# Altium PCB PCB_rockets_test_bench_acquisition.PcbDoc (part 1 of 2)
Units mm, origin at the board's own origin, x right, y up, seen from the top; angles counter-clockwise.
Board outline 99.82 x 99.85 mm, 4 copper layers (Top Layer, Int1 (GND), Int2 (PWR), Bottom Layer), stack 1.57 mm thick; 106 components, 96 nets, 381 pads, 73 vias.
Unrouted connection lines stored in the file: 46.
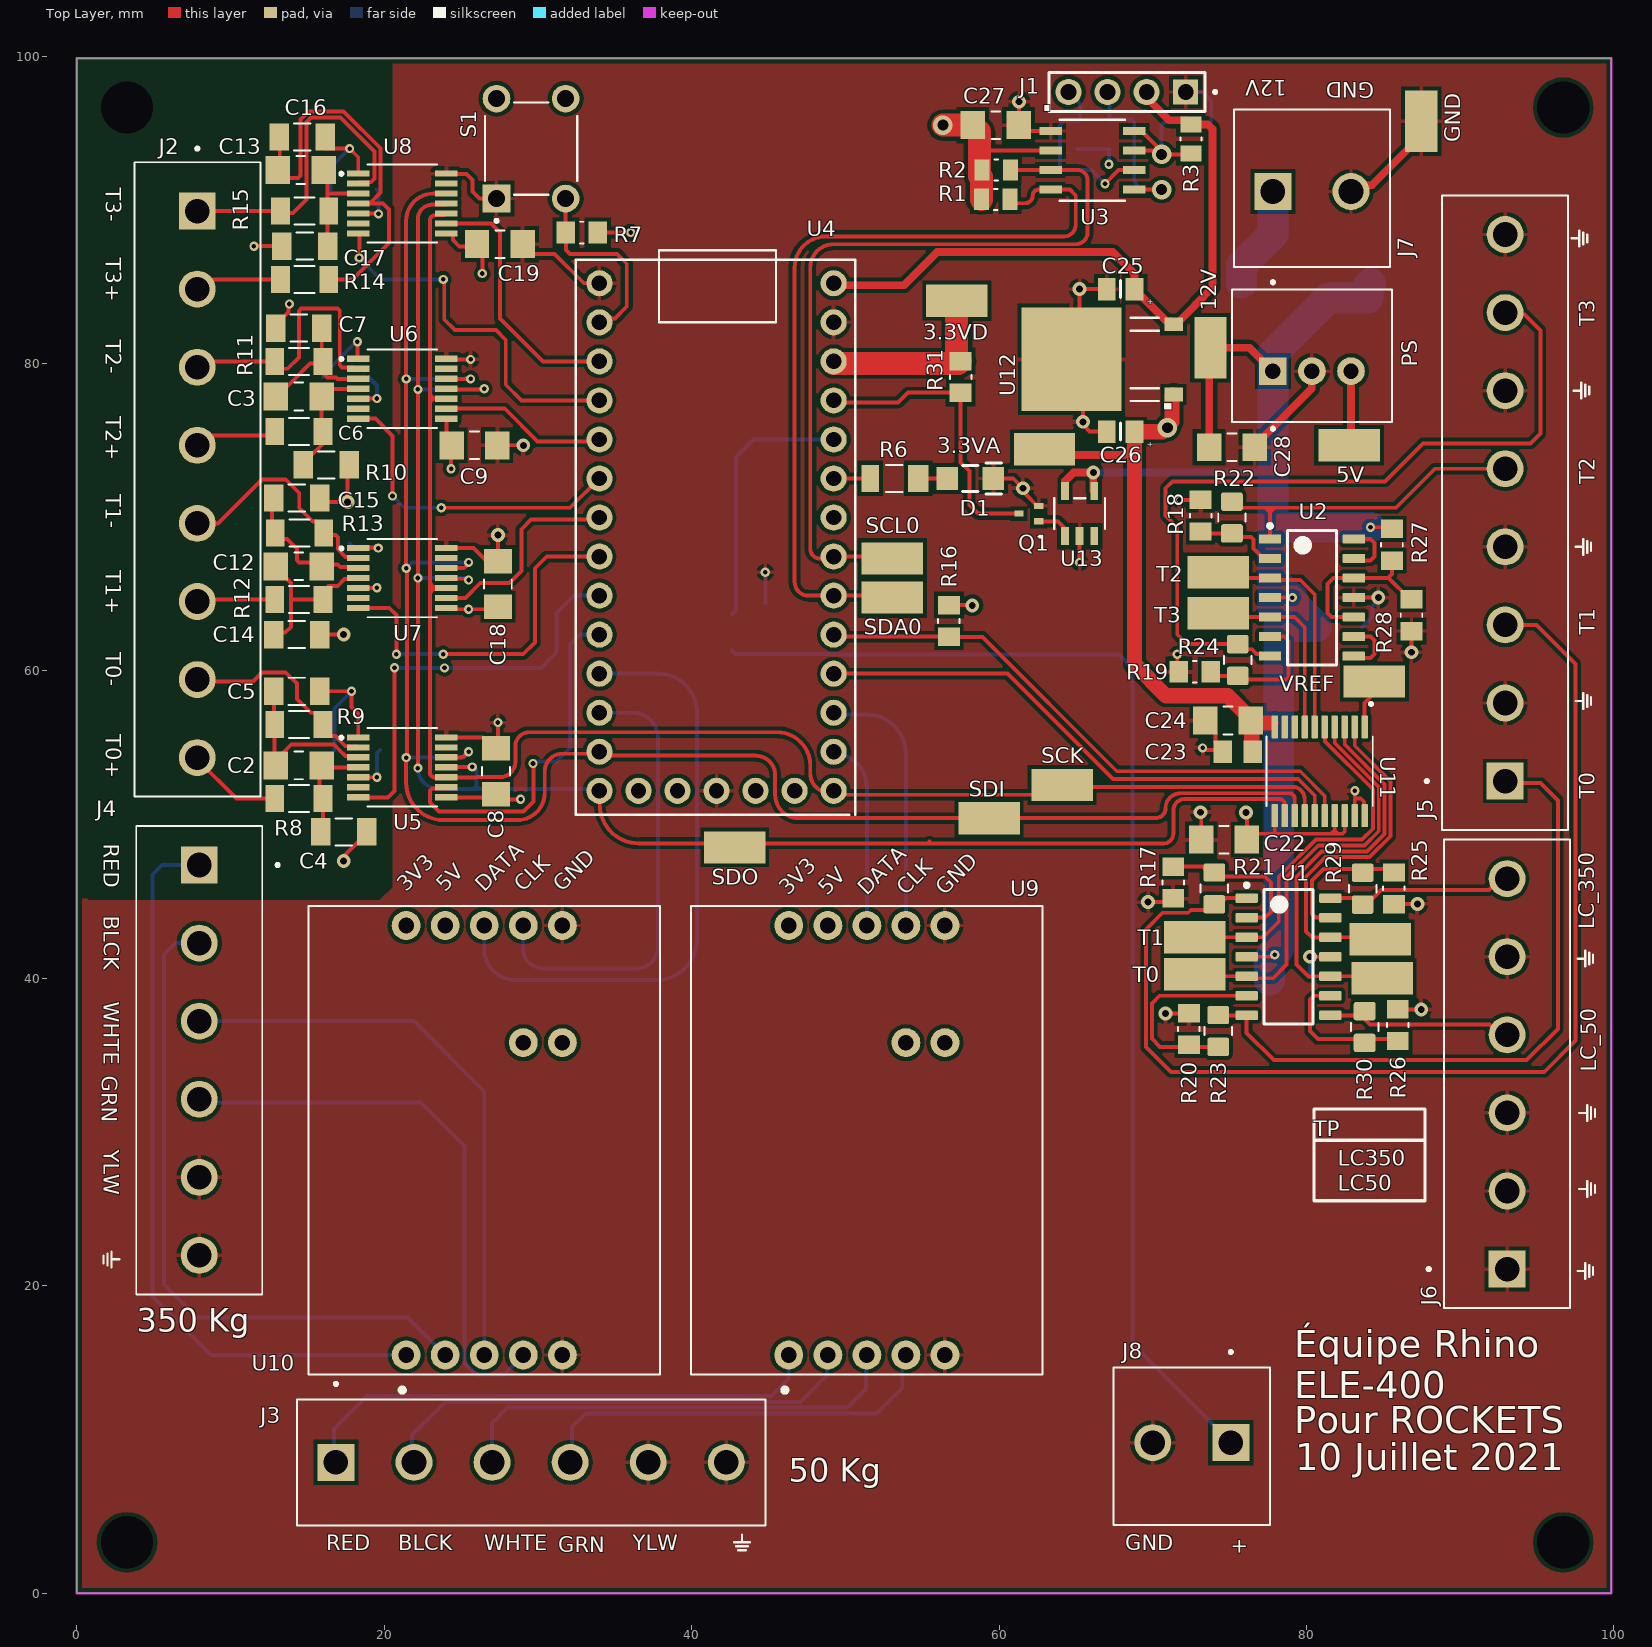
[diagram p0: Top Layer view]
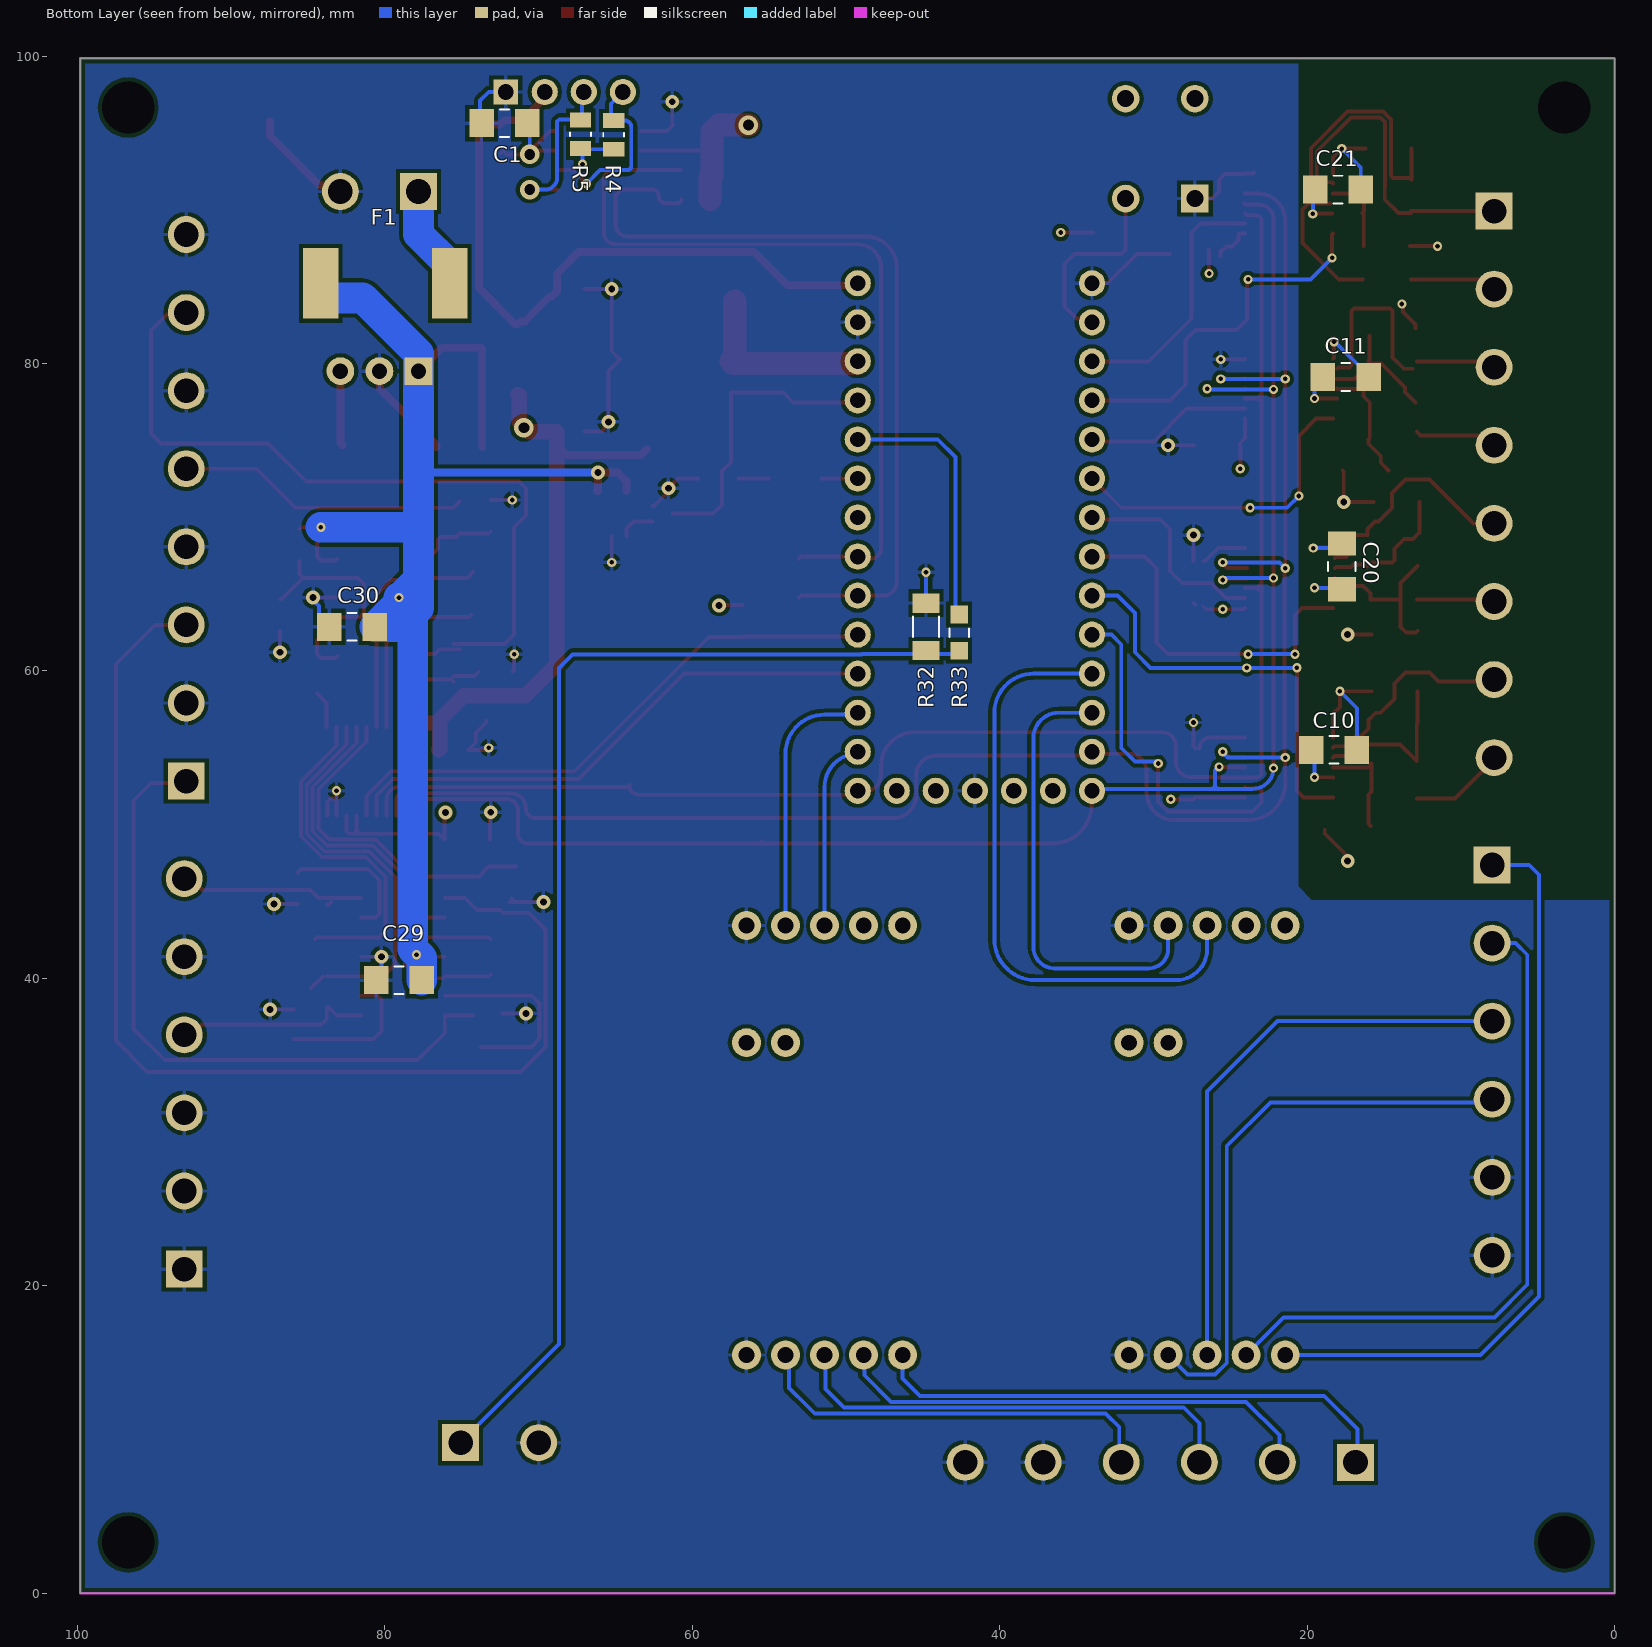
[diagram p1: Bottom Layer view, seen from below]
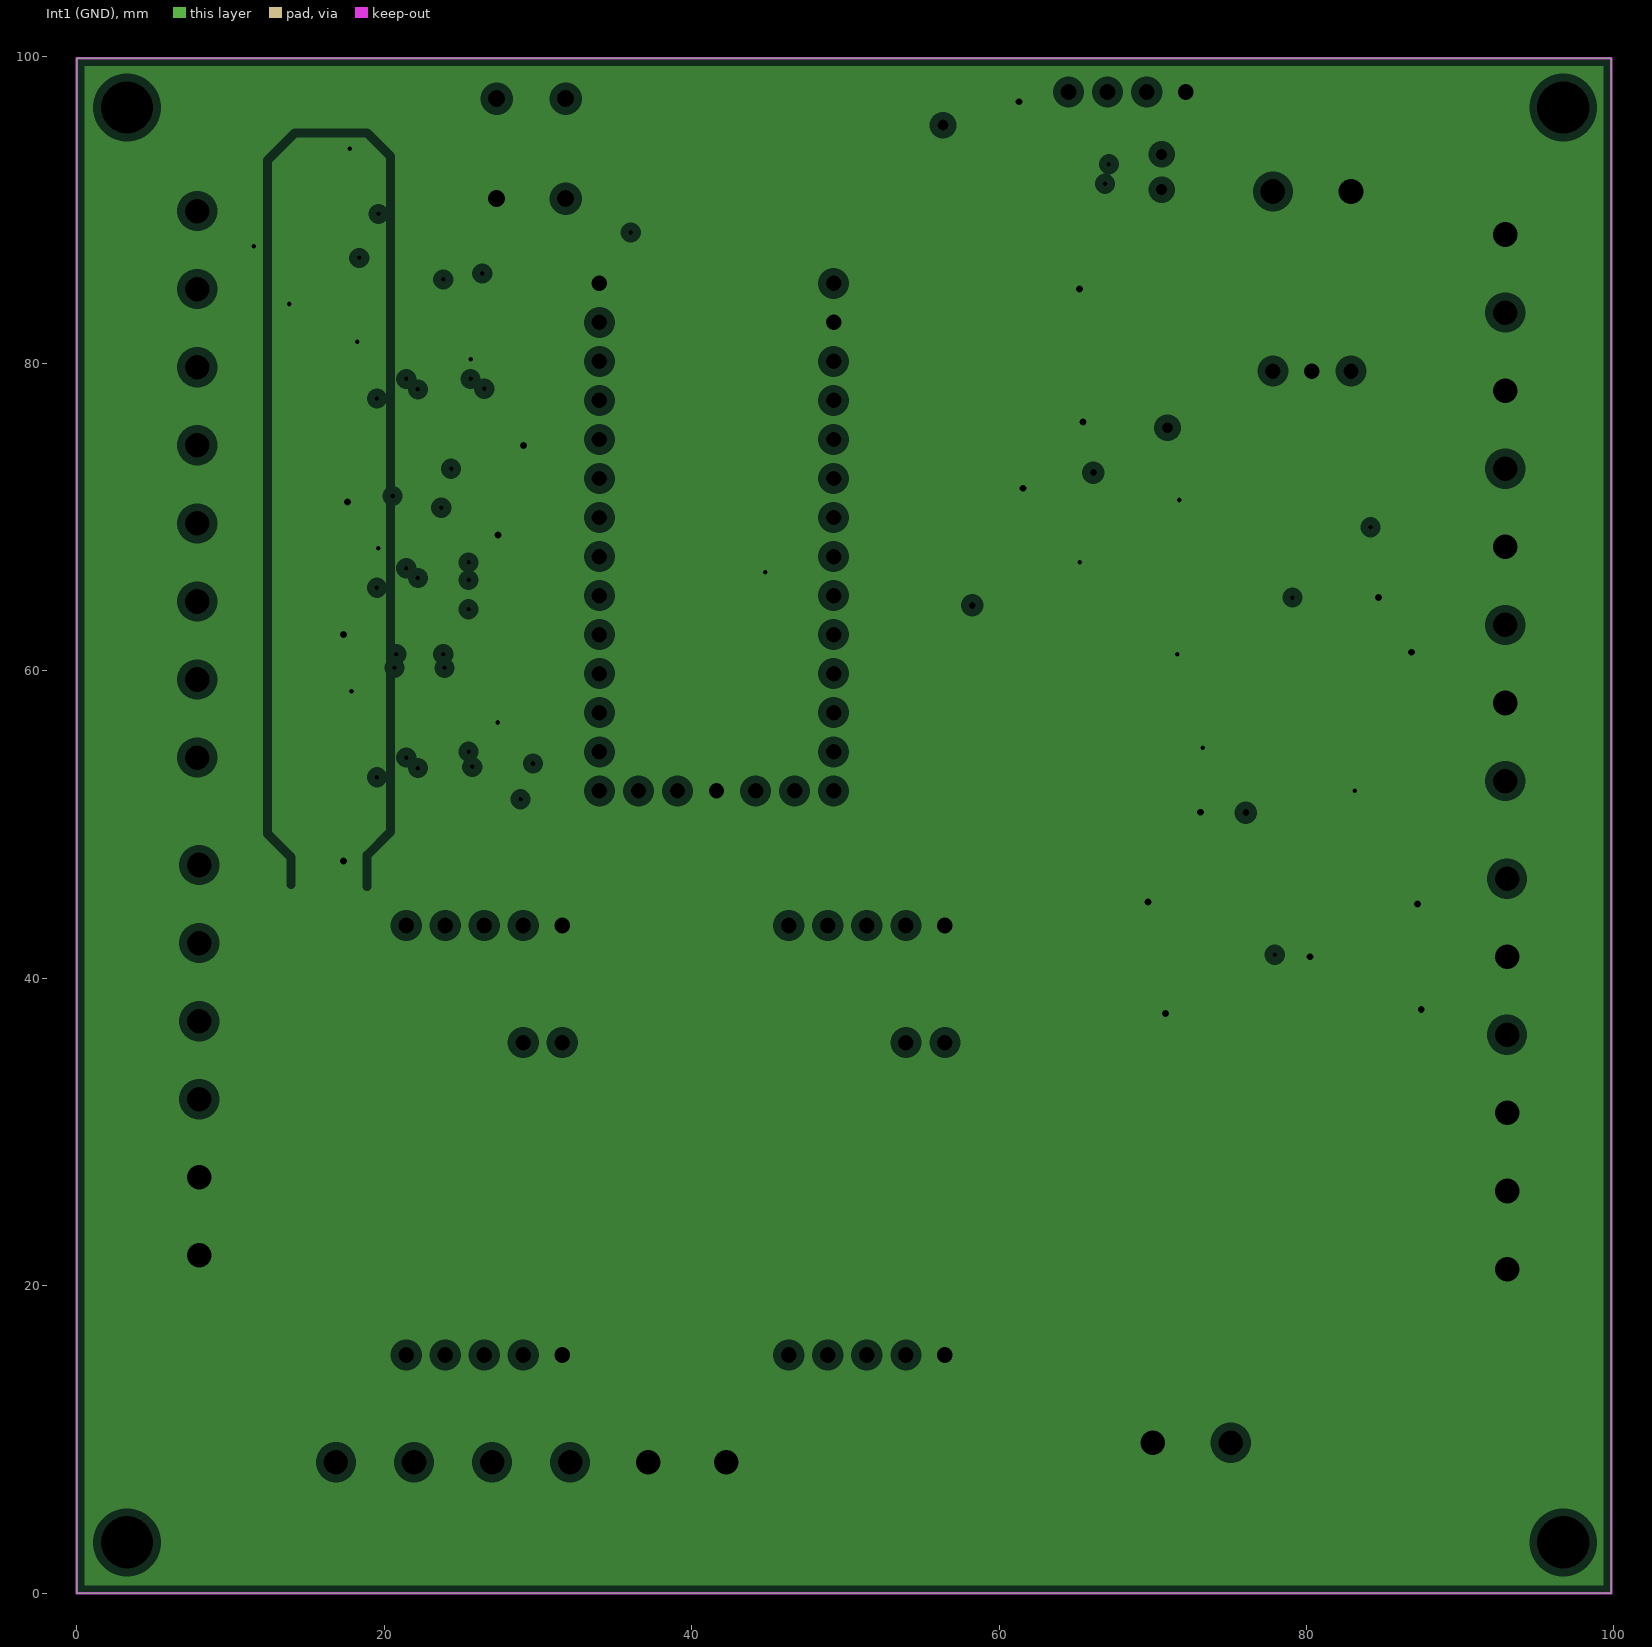
[diagram p2: Int1 (GND), clearances drawn from the general rule]
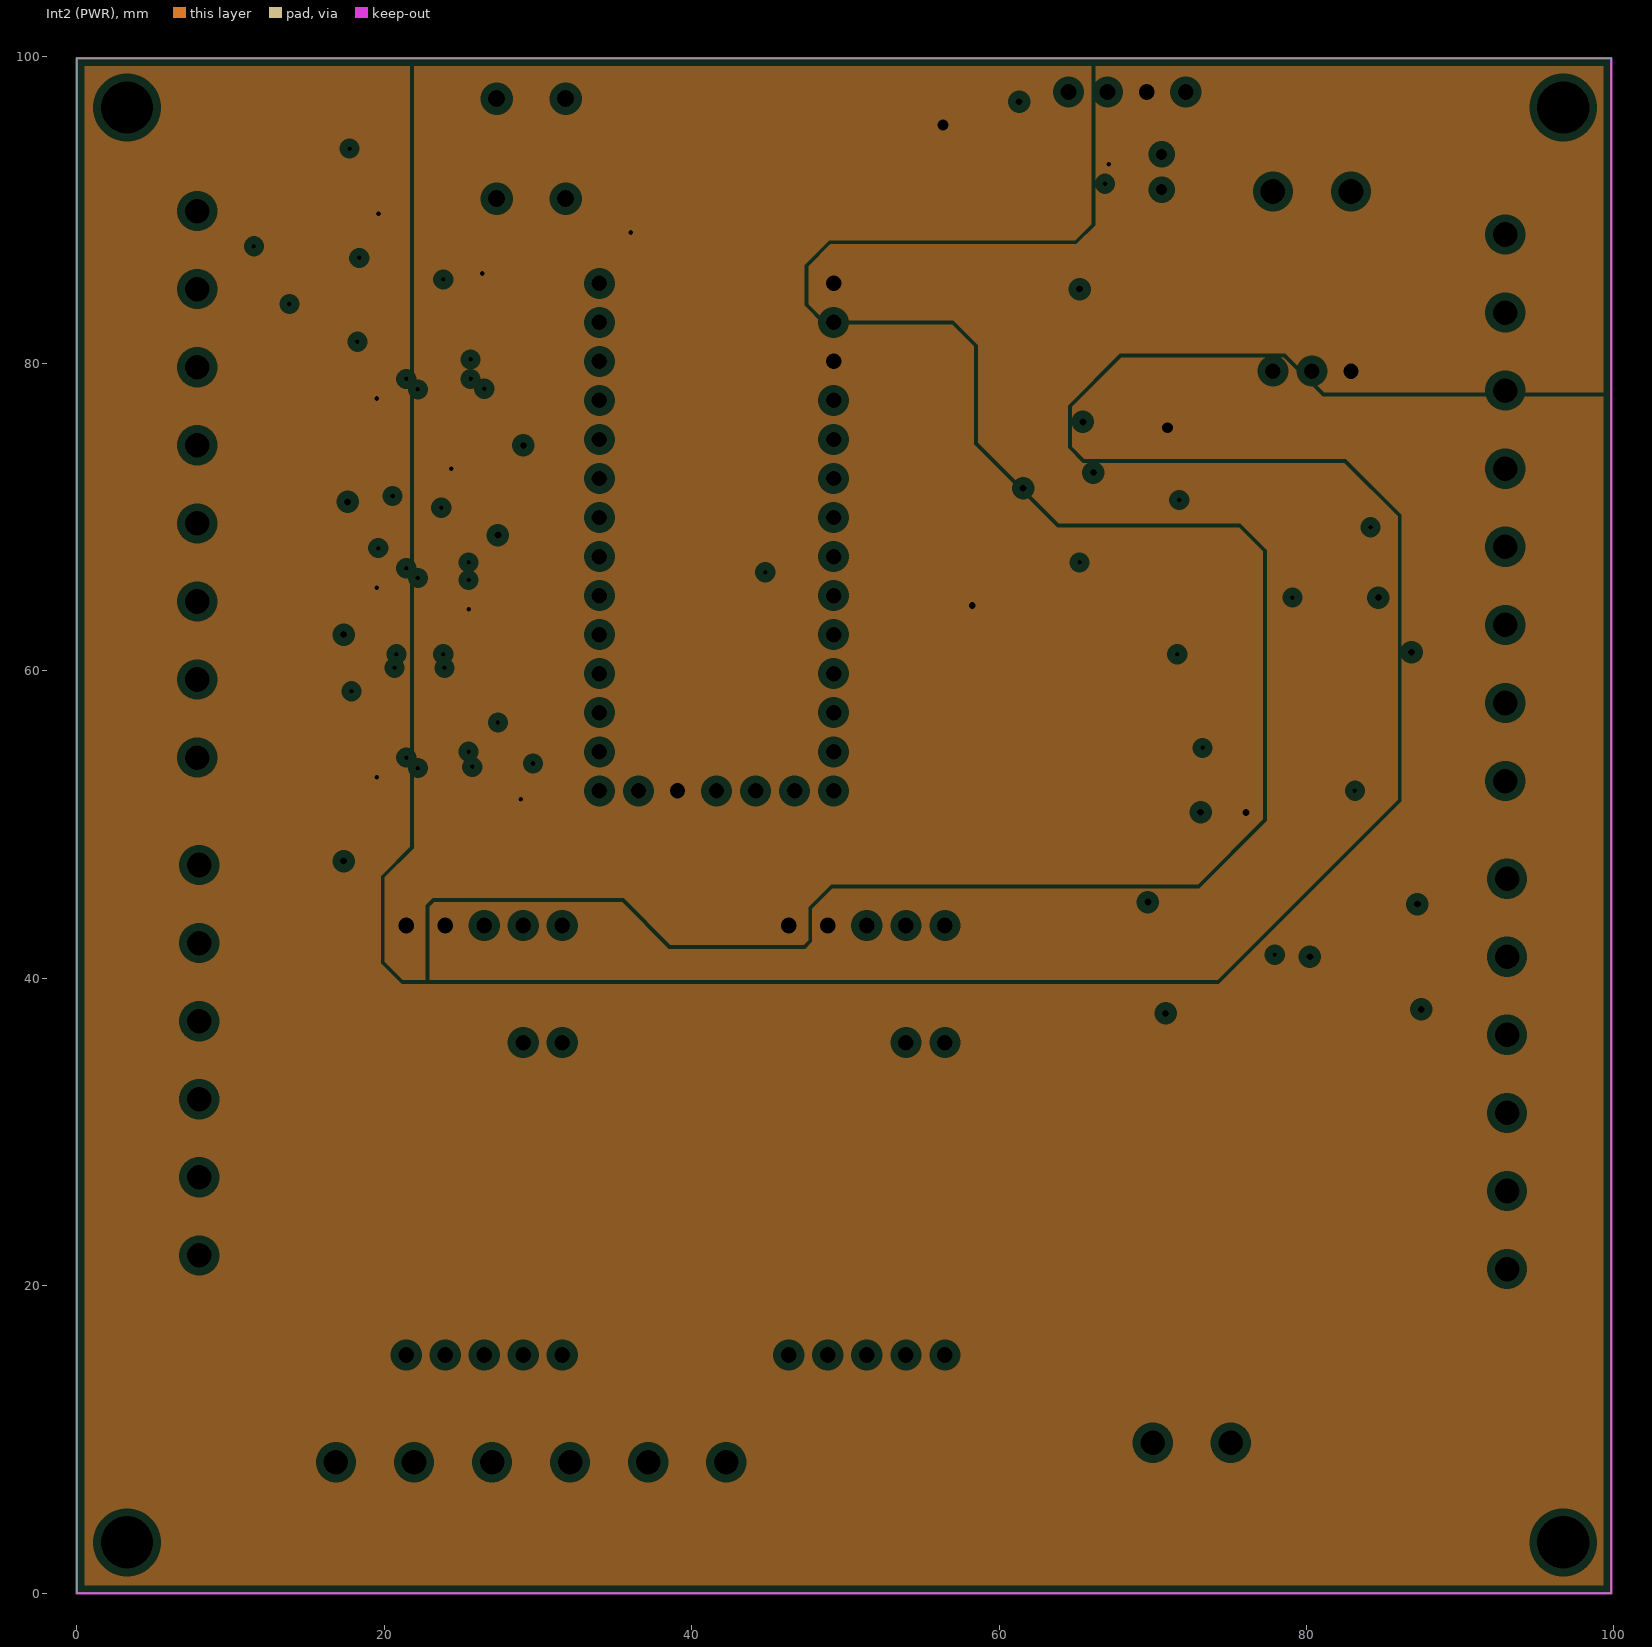
[diagram p3: Int2 (PWR), clearances drawn from the general rule]
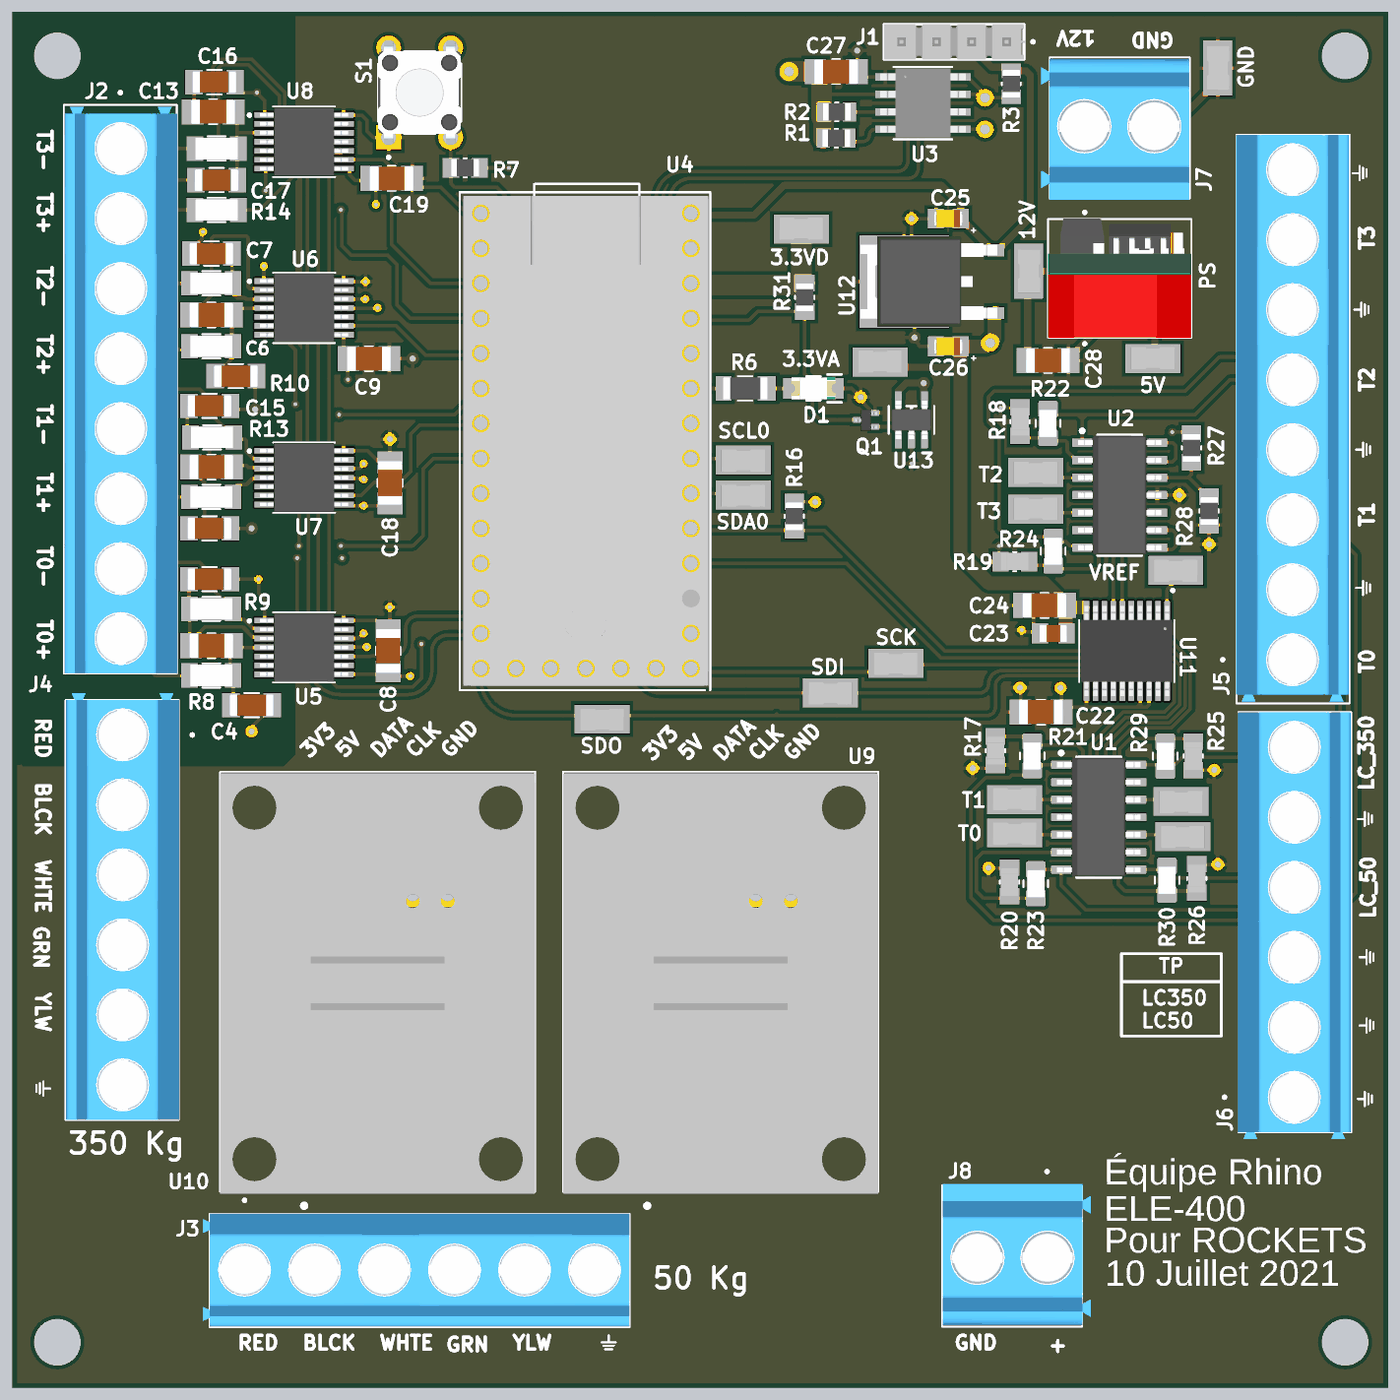
[diagram p5: 3D render of the assembled board from above, using the file's embedded part models]
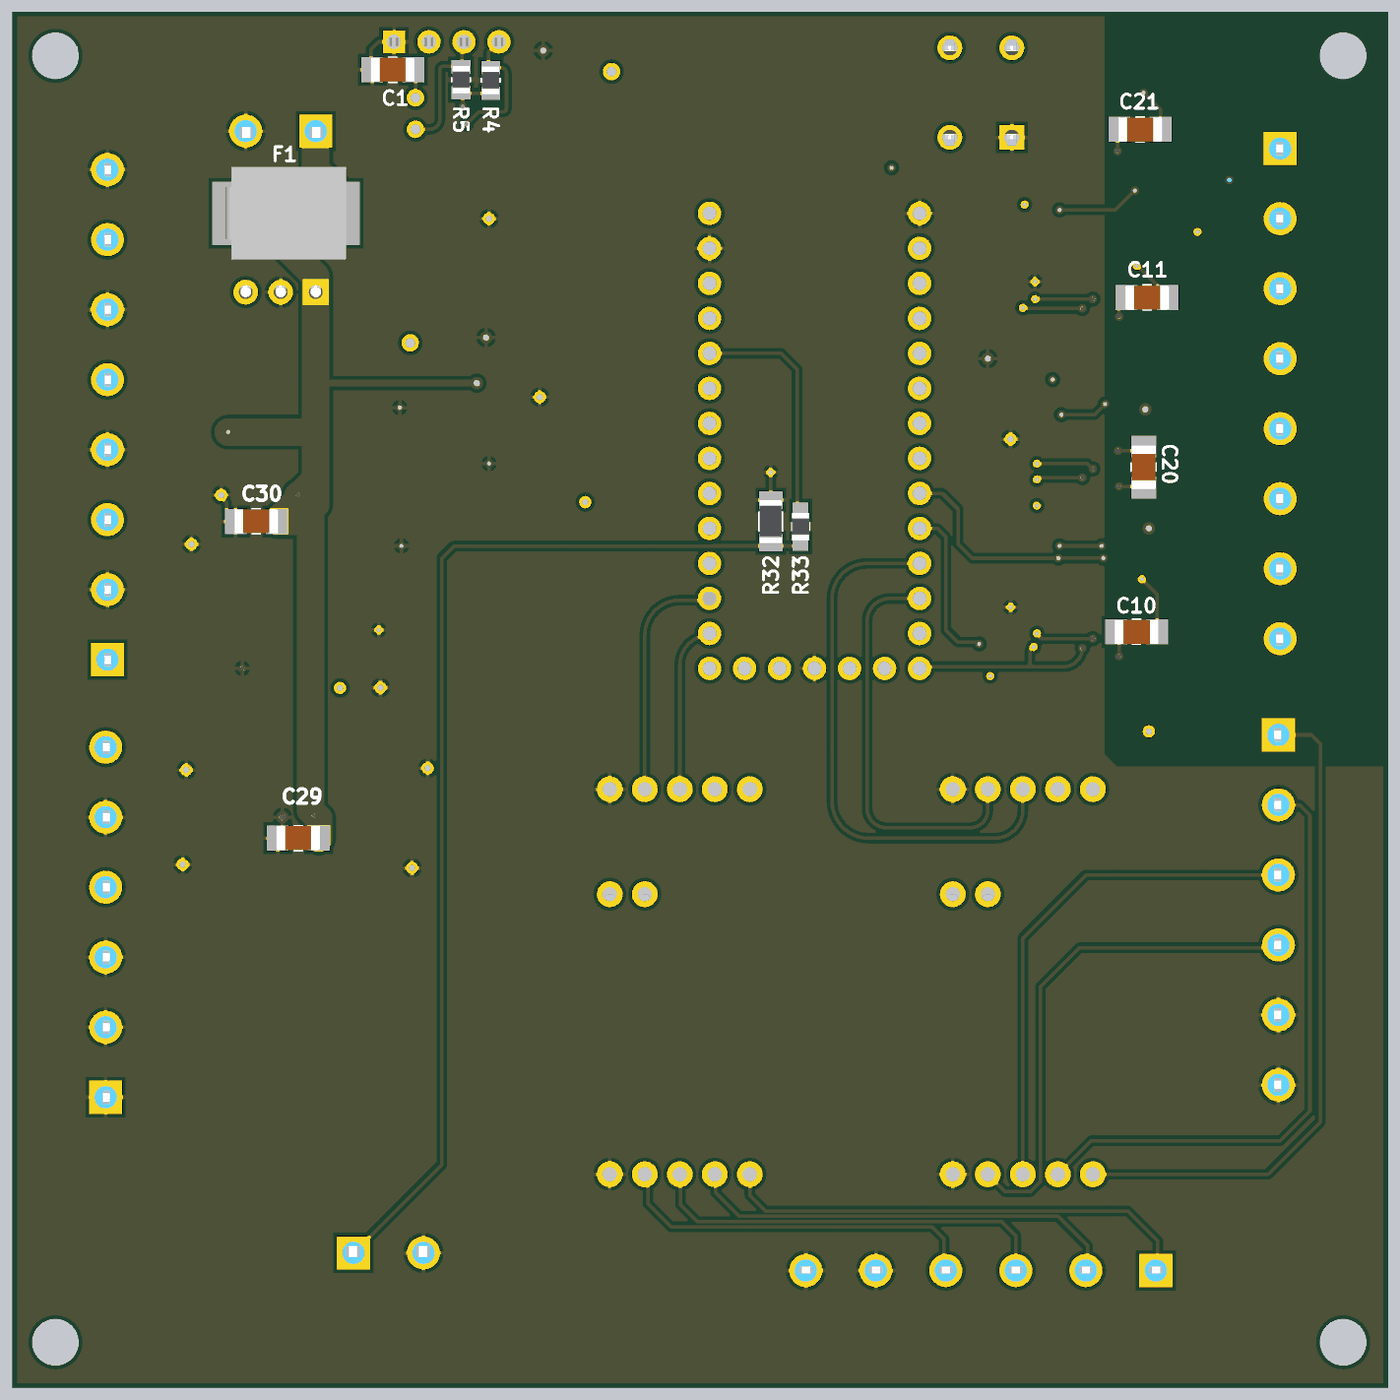
[diagram p6: 3D render of the assembled board from below, using the file's embedded part models]

## Layer stack, top to bottom
Top Solder: solder mask 0.015, SM-001, Dk 3.8
Top Layer: signal copper 0.035
Dielectric 1: prepreg 0.2, PP-017, Dk 4.6
Int1 (GND): plane copper 0.0175, net GND
Dielectric 3: core 1.065, Core-039, Dk 4.5
Int2 (PWR): plane copper 0.0175, net (Multiple Nets)
Dielectric 5: prepreg 0.2, PP-017, Dk 4.6
Bottom Layer: signal copper 0.035
Bottom Solder: solder mask 0.015, SM-001, Dk 3.8

## Board outline
0,0 0,99.848 99.822,99.848 99.822,0

## Design rules (kind name [scope] priority, off if disabled: settings)
BoardOutlineClearance [All] p1: gap=0.254 ignorepadtopadclearanceinfootprint=FALSE except(0: Arc-SplitContinuation Track-SplitContinuation SMDPad-SplitContinuation THPad-SplitContinuation Via-SplitContinuation Fill-SplitContinuation Poly-SplitContinuation Region-SplitContinuation Text-SplitContinuation)
Clearance [All] p1: gap=0.254 ignorepadtopadclearanceinfootprint=FALSE except(0: Arc-Hole Track-Hole SMDPad-Hole THPad-Hole Via-Hole Fill-Hole Poly-Hole Region-Hole Text-Hole; 0.127: Arc-Arc Arc-Track Track-Track SMDPad-SMDPad; 0.2: Arc-SMDPad Arc-THPad Track-SMDPad Track-THPad; 0.5: THPad-THPad)
HoleSize [All] p1: absolutevalues=TRUE maxlimit=6.3 minlimit=0.2 maxpercent=80.000 minpercent=20.000
HoleSize ViaSize [IsVia] p2: absolutevalues=TRUE maxlimit=6.3 minlimit=0.3 maxpercent=80.000 minpercent=20.000
HoleToHoleClearance [All] p1: gap=0.5 allowstackedmicrovias=TRUE
MinimumAnnularRing MinimumAnnularRing_1 [IsVia] p1: minimumring=0.15
MinimumAnnularRing [All] p2: minimumring=0.3
MinimumSolderMaskSliver [All] p1: minsoldermaskwidth=0.2
PlaneClearance [All] p1: clearance=0.508
PlaneConnect [All] p1: planeconnectstyle=Relief reliefexpansion=0.508 reliefentries=4 reliefconductorwidth=0.254 reliefairgap=0.254
PolygonConnect [All] p1: connectstyle=Relief reliefconductorwidth=0.254 reliefentries=4 polygonreliefangle="90 Angle" airgapwidth=0.254
RoutingVias [All] p1: holewidth=0.5 width=0.9 viastyle="Through Hole" minholewidth=0.3 minwidth=0.4 maxholewidth=0.711 maxwidth=1.27
SilkToSolderMaskClearance [IsPad] p1: minsilkscreentomaskgap=0.15 clearancetoexposedcopper=TRUE
SolderMaskExpansion [All] p1: expansion=0.05 istentingtop=FALSE
UnRoutedNet [All] p1: checkbadconnections=TRUE
Width [All] p1: maxlimit=5 minlimit=0.127 preferedwidth=0.254
23 further rules are at their usual default settings.

## Classes and differential pairs
component class Thermocouples: C2 C3 C4 C5 C6 C7 C8 C9 C10 C11 C12 C13 C14 C15 C16 C17 C18 C19 C20 C21 J2 R8 R9 R10 R11 R12 R13 R14 R15 U5 U6 U7 U8
component class Teensy: C1 C27 D1 J1 J8 R1 R2 R3 R4 R5 R6 R7 R32 R33 S1 SCK SCL0 SDA0 SDI SDO U3 U4
component class Loadcells: J3 J4 U9 U10
component class DAC: C22 C23 C24 C29 C30 J5 J6 LC50 LC350 R16 R17 R18 R19 R20 R21 R22 R23 R24 R25 R26 R27 R28 R29 R30 T0 T1 T3 TP_T1 U1 U2 U11 VREF
component class Alim: 3.3vA 3.3VA 3.3VD 5V 12V C25 C26 C28 F1 GND J7 PS Q1 R31 U12 U13

## Components (designator, comment, footprint, x,y, rotation, side; value= is the part's Value field where it differs from the comment)
3.3VA "RCS-0C" RCS-0C 62.952,74.422 r180 top
3.3VD "RCS-0C" RCS-0C 57.237,84.074 r180 top
5V "RCS-0C" RCS-0C 82.764,74.676 r180 top
12V "RCS-0C" RCS-0C 73.747,81.026 r90 top
C1 "C3216C0G1H104J160AA" C3216C0G1H104J160AA 72.223,95.631 r180 bottom value=0.1uF
C2 "C3216C0G1H104J160AA" C3216C0G1H104J160AA 14.438,53.848 r180 top value=0.1uF
C3 "C3216C0G1H104J160AA" C3216C0G1H104J160AA 14.438,77.851 r180 top value=0.1uF
C4 "GRM3195C1H113JA01D" GRM3195C1H113JA01D 17.359,49.53 r180 top value="0.011 uF"
C5 "GRM3195C1H113JA01D" GRM3195C1H113JA01D 14.311,58.674 r0 top value="0.011 uF"
C6 "GRM3195C1H113JA01D" GRM3195C1H113JA01D 16.216,73.406 r180 top value="0.011 uF"
C7 "GRM3195C1H113JA01D" GRM3195C1H113JA01D 14.438,82.296 r180 top value="0.011 uF"
C8 "C3216C0G1H104J160AA" C3216C0G1H104J160AA 27.265,53.467 r270 top value=0.1uF
C9 "C3216C0G1H104J160AA" C3216C0G1H104J160AA 25.868,74.676 r180 top value=0.1uF
C10 "C3216C0G1H104J160AA" C3216C0G1H104J160AA 18.248,54.864 r0 bottom value=0.1uF
C11 "C3216C0G1H104J160AA" C3216C0G1H104J160AA 17.486,79.121 r0 bottom value=0.1uF
C12 "C3216C0G1H104J160AA" C3216C0G1H104J160AA 14.438,66.802 r0 top value=0.1uF
C13 "C3216C0G1H104J160AA" C3216C0G1H104J160AA 14.565,92.583 r0 top value=0.1uF
C14 "GRM3195C1H113JA01D" GRM3195C1H113JA01D 14.311,62.357 r180 top value="0.011 uF"
C15 "GRM3195C1H113JA01D" GRM3195C1H113JA01D 14.311,71.247 r0 top value="0.011 uF"
C16 "GRM3195C1H113JA01D" GRM3195C1H113JA01D 14.663,94.742 r180 top value="0.011 uF"
C17 "GRM3195C1H113JA01D" GRM3195C1H113JA01D 14.819,87.63 r180 top value="0.011 uF"
C18 "C3216C0G1H104J160AA" C3216C0G1H104J160AA 27.392,65.659 r270 top value=0.1uF
C19 "C3216C0G1H104J160AA" C3216C0G1H104J160AA 27.519,87.757 r180 top value=0.1uF
C20 "C3216C0G1H104J160AA" C3216C0G1H104J160AA 17.74,66.802 r270 bottom value=0.1uF
C21 "C3216C0G1H104J160AA" C3216C0G1H104J160AA 17.994,91.313 r0 bottom value=0.1uF
C22 "C3216C0G1H104J160AA" C3216C0G1H104J160AA 74.636,49.022 r0 top value=0.1uF
C23 "EMK212BB7475MD-T" EMK212BB7475MD-T 75.525,54.737 r0 top value=4.7uF
C24 "C3216C0G1H104J160AA" C3216C0G1H104J160AA 74.89,56.769 r0 top value=0.1uF
C25 "TAJP106K010RNJ" CAPC2012X140N 67.905,84.836 r180 top value=10uF
C26 "TAJP106K010RNJ" CAPC2012X140N 67.905,75.565 r180 top value=10uF
C27 "C3216C0G1H104J160AA" C3216C0G1H104J160AA 59.777,95.504 r180 top value=0.1uF
C28 "C3216C0G1H104J160AA" C3216C0G1H104J160AA 75.144,74.549 r180 top value=0.1uF
C29 "C3216C0G1H104J160AA" C3216C0G1H104J160AA 79.081,39.878 r180 bottom value=0.1uF
C30 "C3216C0G1H104J160AA" C3216C0G1H104J160AA 82.129,62.865 r180 bottom value=0.1uF
D1 "150120YS75000" 150120YS75000 58.126,72.517 r180 top
F1 "MF-SM150/33-2" MF-SM150/33-2 79.97,85.217 r180 bottom
GND "RCS-0C" RCS-0C 87.463,95.758 r90 top
J1 "TSW-104-14-T-S" TSW-104-14-T-S 72.136,97.663 r180 top
J2 "TB006-508-08BE" TB006-508-08BE_v2 7.834,89.916 r270 top
J3 "TB006-508-06BE" TB006-508-06BE 16.851,8.509 r0 top
J4 "TB006-508-06BE" TB006-508-06BE 7.961,47.371 r270 top
J5 "TB006-508-08BE" TB006-508-08BE 92.924,52.832 r90 top
J6 "TB006-508-06BE" TB006-508-06BE 93.051,21.082 r90 top
J7 "TB007-508-02BE" CUI_TB007-508-02BE 77.811,91.186 r0 top
J8 "TB007-508-02BE" CUI_TB007-508-02BE 75.074,9.787 r180 top
LC50 "RCS-0C" RCS-0C 84.923,40.005 r0 top
LC350 "RCS-0C" RCS-0C 84.796,42.545 r0 top
PS "OKI-78SR-5/1.5-W36-C" CONV_OKI-78SR-5/1.5-W36-C 80.351,79.502 r0 top
Q1 "DMN5L06TK" DMN5L06TK 61.936,70.231 r90 top
R1 "ESR10EZPJ222" RESC2012X65N 59.777,90.678 r180 top
R2 "ESR10EZPJ222" RESC2012X65N 59.818,92.583 r180 top
R3 "ERJ-6GEYJ204V" RESC2012X70N 72.477,94.615 r90 top
R4 "ESR10EZPJ222" RESC2012X65N 65.111,94.869 r270 bottom
R5 "ESR10EZPJ222" RESC2012X65N 67.27,94.91 r270 bottom
R6 "RMCF1206JT470R" RMCF1206JT470R 53.173,72.517 r180 top value=470
R7 "CRGH0805F4K7" CRGH0805F4K7 32.853,88.519 r0 top value=4.7k
R8 "RNCS1206BKE100R" RNCS1206BKE100R 14.438,51.689 r0 top value=100
R9 "RNCS1206BKE100R" RNCS1206BKE100R 14.438,56.515 r180 top value=100
R10 "RNCS1206BKE100R" RNCS1206BKE100R 14.438,75.565 r0 top value=100
R11 "RNCS1206BKE100R" RNCS1206BKE100R 14.438,80.137 r0 top value=100
R12 "RNCS1206BKE100R" RNCS1206BKE100R 14.438,64.643 r0 top value=100
R13 "RNCS1206BKE100R" RNCS1206BKE100R 14.489,68.961 r180 top value=100
R14 "RNCS1206BKE100R" RNCS1206BKE100R 14.819,85.471 r0 top value=100
R15 "RNCS1206BKE100R" RNCS1206BKE100R 14.819,89.916 r0 top value=100
R16 "CRGH0805F4K7" CRGH0805F4K7 56.729,63.246 r90 top value=4.7k
R17 "CR0805-FX-1001ELF" CR0805-FX-1001ELF 71.334,46.228 r90 top value=1k
R18 "CR0805-FX-1001ELF" CR0805-FX-1001ELF 73.112,70.104 r270 top value=1k
R19 "CR0805-FX-1001ELF" CR0805-FX-1001ELF 72.731,59.944 r0 top value=1k
R20 "CR0805-FX-1001ELF" CR0805-FX-1001ELF 72.35,36.703 r270 top value=1k
R21 "CRG0805F3K0" CRG0805F3K0 74.001,45.847 r270 top value=3K
R22 "CRG0805F3K0" CRG0805F3K0 75.144,69.977 r90 top value=3K
R23 "CRG0805F3K0" CRG0805F3K0 74.255,36.576 r90 top value=3K
R24 "CRG0805F3K0" CRG0805F3K0 75.525,60.706 r90 top value=3K
R25 "CR0805-FX-1001ELF" CR0805-FX-1001ELF 85.685,45.847 r90 top value=1k
R26 "CR0805-FX-1001ELF" CR0805-FX-1001ELF 85.939,36.957 r270 top value=1k
R27 "CRGH0805F4K7" CRGH0805F4K7 85.558,68.199 r90 top value=4.7k
R28 "CRGH0805F4K7" CRGH0805F4K7 86.828,63.627 r90 top value=4.7k
R29 "CRG0805F3K0" CRG0805F3K0 83.653,45.828 r270 top value=3K
R30 "CRG0805F3K0" CRG0805F3K0 83.78,36.83 r90 top value=3K
R31 "CRGH0805F4K7" CRGH0805F4K7 57.491,79.121 r90 top value=4.7k
R32 "RC1206FR-07165RL" RC1206FR-07165RL 44.791,62.865 r270 bottom value=165
R33 "ERJ-P06J103V" ERJ-P06J103V 42.632,62.484 r90 bottom value=10k
S1 "B3F-1022" B3F-1022 29.551,93.98 r90 top
SCK "RCS-0C" RCS-0C 64.095,52.578 r0 top
SCL0 "RCS-0C" RCS-0C 53.046,67.31 r0 top
SDA0 "RCS-0C" RCS-0C 53.046,64.77 r0 top
SDI "RCS-0C" RCS-0C 59.35,50.419 r0 top
SDO "RCS-0C" RCS-0C 42.799,48.514 r0 top
T0 "RCS-0C" RCS-0C 72.731,40.259 r0 top
T1 "RCS-0C" RCS-0C 72.731,42.672 r180 top
T2 "RCS-0C" RCS-0C 74.255,66.421 r0 top
T3 "RCS-0C" RCS-0C 74.255,63.754 r180 top
U1 "LMC660AIM/NOPB" D0014A_N 78.827,41.402 r0 top
U2 "LMC660AIM/NOPB" D0014A_N 80.351,64.77 r0 top
U3 "PCA9306D,118" SO8_SOT96-1_NXP 66.07,93.218 r0 top
U4 "teensy_4_0" teensy_4_0 49.236,85.217 r270 top
U5 "MAX31856MUD+" PCBComponent_1 21.169,53.721 r0 top
U6 "MAX31856MUD+" PCBComponent_1 21.169,78.359 r0 top
U7 "MAX31856MUD+" PCBComponent_1 21.169,66.04 r0 top
U8 "MAX31856MUD+" PCBComponent_1 21.169,90.409 r0 top
U9 "SEN-13879" SPARKFUN_SEN-13879 51.395,29.464 r90 top
U10 "SEN-13879" SPARKFUN_SEN-13879 26.503,29.464 r90 top
U11 "MAX5725BAUP+" MAX5725BAUP+ 80.859,53.467 r270 top
U12 "LMS8117ADT-3.3/NOPB" TD03B 64.857,80.264 r90 top
U13 "TPS3847085DBVR" DBV5_TEX-M 65.238,70.231 r90 top
VREF "RCS-0C" RCS-0C 84.415,59.309 r0 top

## Footprints (in the part's own frame and the unit in brackets; to place one, negate y for a bottom-side part, rotate by r counter-clockwise, add the part's x,y. Pads: shape width x height; smd on the part's side, far side on the other; paste and mask are expansions set on the pad)
150120YS75000 [mm]
  rect 1.4x1.5 smd: 1(-1.5,0) 2(1.5,0)
  silkscreen extent -2.03,-1.02 0.5,1.02, body extent -1.6,-0.8 1.6,0.8, height 0.68
B3F-1022 [mm]
  rect 1.8x1.8 hole 1.1: 1(-3.25,2.25)
  round 1.8 hole 1.1: 2(3.25,2.25) 3(-3.25,-2.25) 4(3.25,-2.25)
  silkscreen extent -4.8,-3 3,3, body extent -3.85,-3 3.85,3, height 5.2
C3216C0G1H104J160AA [mm]
  rect 1.59x1.82 smd: 1(-1.486,0) 2(1.486,0)
  silkscreen extent -0.29,-0.9 0.29,0.9, body extent -1.6,-0.89 1.6,0.91, height 1.59
CAPC2012X140N [mm]
  rect 1.15x1.45 smd: 1(-0.9,0) 2(0.9,0)
  silkscreen extent 0,-0.55 0,0.55, body extent -1.02,-0.65 1.03,0.65, height 1.2
CONV_OKI-78SR-5/1.5-W36-C [mm]
  rect 1.8x1.8 hole 1: 1(-2.54,0)
  round 1.8 hole 1: 2(0,0) 3(2.54,0)
  silkscreen extent -5.2,-3.85 5.2,5.3, body extent -5.21,-3.3 5.21,5.33, height 16.51
CR0805-FX-1001ELF [mm]
  rect 1.2x1.42 smd: 1(-1.035,0) 2(1.035,0)
  silkscreen extent -0.12,-0.7 0.12,0.7, body extent -1,-0.62 1,0.63, height 0.5
CRG0805F3K0 [mm]
  rrect25% 1.2x1.42 smd: 1(-1.035,0) 2(1.035,0)
  silkscreen extent -0.25,-0.89 0.25,0.89, body extent -1,-0.63 1,0.63, height 0.6
CRGH0805F4K7 [mm]
  rect 1.2x1.42 smd: 1(-1.035,0) 2(1.035,0)
  silkscreen extent -0.12,-0.7 0.12,0.7, body extent -1,-0.62 1,0.63, height 0.65
CUI_TB007-508-02BE [mm]
  rect 2.4x2.4 hole 1.6: 1(0,0)
  round 2.4 hole 1.6: 2(5.08,0)
  silkscreen extent -2.54,-6 7.62,5.35, body extent -3.17,-5 7.59,5.25, height 14
D0014A_N [mm] "SOIC, 14-Leads, Body 8.75x4mm, Pitch 1.27mm, IPC Medium Density"
  rrect17% 1.45x0.6 smd: 1(-2.725,3.81) 2(-2.725,2.54) 3(-2.725,1.27) 4(-2.725,0) 5(-2.725,-1.27) 6(-2.725,-2.54) 7(-2.725,-3.81) 8(2.725,-3.81) 9(2.725,-2.54) 10(2.725,-1.27) 11(2.725,0) 12(2.725,1.27) 13(2.725,2.54) 14(2.725,3.81)
  silkscreen extent -2.85,-4.37 1.6,4.78, body extent -3.02,-4.32 3.02,4.32, height 1.59
DBV5_TEX-M [mil]
  rect 46.5x20 smd paste+0 mask+0: 1(-57.75,37.4) 2(-57.75,0) 3(-57.75,-37.4) 4(57.75,-37.4) 5(57.75,37.4)
  silkscreen extent -40,-65 40,65, body extent -55,-57 55,57, height 47
DMN5L06TK [mm]
  rect 0.4x0.6 smd: 1(0,0.645) 2(-0.5,-0.645) 3(0.5,-0.645)
  body extent -0.81,-0.8 0.76,0.8, height 0.79
EMK212BB7475MD-T [mm]
  rect 1.2x1.48 smd: 1(-0.963,0) 2(0.963,0)
  body extent -1,-0.62 1,0.63, height 0.95
ERJ-P06J103V [mm]
  rect 1.15x1.15 smd: 1(-1.166,0) 2(1.184,0)
  silkscreen extent -0.27,-0.62 0.29,0.62, body extent -0.99,-0.62 1.01,0.63, height 0.6
GRM3195C1H113JA01D [mm]
  rect 1.28x1.77 smd: 1(-1.495,0) 2(1.495,0)
  silkscreen extent -0.53,-0.88 0.53,0.88, body extent -1.6,-0.8 1.6,0.8, height 0.95
MAX5725BAUP+ [mm]
  rrect25% 1.5x0.41 smd mask+0.13: 1(-2.885,2.925) 2(-2.885,2.275) 3(-2.885,1.625) 4(-2.885,0.975) 5(-2.885,0.325) 6(-2.885,-0.325) 7(-2.885,-0.975) 8(-2.885,-1.625) 9(-2.885,-2.275) 10(-2.885,-2.925) 11(2.885,-2.925) 12(2.885,-2.275) 13(2.885,-1.625) 14(2.885,-0.975) 15(2.885,-0.325) 16(2.885,0.325) 17(2.885,0.975) 18(2.885,1.625) 19(2.885,2.275) 20(2.885,2.925)
  silkscreen extent -4.48,-3.45 2.25,3.45, body extent -3.28,-3.3 3.28,3.3, height 1.09
MF-SM150/33-2 [mm]
  rect 2.3x4.6 smd: 1(-4.2,0) 2(4.2,0)
  body extent -4.37,-3.35 4.38,3.36, height 2.64
PCBComponent_1 [mm]
  rrect10% 1.48x0.41 smd mask+0.13: 1(-2.865,1.95) 2(-2.865,1.3) 3(-2.865,0.65) 4(-2.865,0) 5(-2.865,-0.65) 6(-2.865,-1.3) 7(-2.865,-1.95) 8(2.865,-1.95) 9(2.865,-1.3) 10(2.865,-0.65) 11(2.865,0) 12(2.865,0.65) 13(2.865,1.3) 14(2.865,1.95)
  silkscreen extent -4.06,-2.55 2.25,2.55, body extent -3.2,-2.5 3.2,2.5, height 1.1
RC1206FR-07165RL [mm]
  rect 1.27x1.73 smd: 1(-1.55,0)
  rect 1.23x1.73 smd: 2(1.55,0)
  silkscreen extent -0.67,-0.85 0.67,0.85, body extent -1.55,-0.8 1.55,0.8, height 0.65
RCS-0C [mm]
  rect 4x2.1 smd: 1(0,0)
  body extent -1.6,-0.84 1.6,0.76, height 1.22
RESC2012X65N [mm]
  rect 0.97x1.38 smd: 1(-0.93,0) 2(0.93,0)
  silkscreen extent -0.12,-0.68 0.12,0.68, body extent -1,-0.63 1,0.63, height 0.65
RESC2012X70N [mm]
  rect 1.04x1.38 smd: 1(-0.94,0) 2(0.94,0)
  silkscreen extent -0.1,-0.68 0.1,0.68, body extent -1,-0.62 1,0.63, height 0.7
RMCF1206JT470R [mm]
  rect 1.33x1.77 smd: 1(-1.566,0)
  rect 1.13x1.77 smd: 2(1.566,0)
  silkscreen extent -0.53,-0.88 0.53,0.88, body extent -1.6,-0.8 1.6,0.8, height 0.7
RNCS1206BKE100R [mm]
  rect 1.21x1.77 smd: 1(-1.575,0) 2(1.575,0)
  silkscreen extent -0.65,-0.88 0.65,0.88, body extent -1.52,-0.77 1.53,0.78, height 0.65
SO8_SOT96-1_NXP [mil]
  rect 57.5x21 smd paste+0 mask+0: 1(-107.25,75) 2(-107.25,25) 3(-107.25,-25) 4(-107.25,-75) 5(107.25,-75) 6(107.25,-25) 7(107.25,25) 8(107.25,75)
  silkscreen extent -84,-104 84,104, body extent -122,-98 122,99, height 69
SPARKFUN_SEN-13879 [mil]
  round 74 hole 40: 1(-550,200) 2(-550,100) 3(-550,0) 4(-550,-100) 5(-550,-200) 6(550,-200) 7(550,-100) 8(550,0) 9(550,100) 10(550,200) 11(250,-100) 12(250,-200)
  silkscreen extent -646,-450 600,450, body extent -605,-450 595,450, height 281
TB006-508-06BE [mm]
  rect 2.4x2.4 hole 1.6: 1(0,0)
  round 2.4 hole 1.6: 2(5.08,0) 3(10.16,0) 4(15.24,0) 5(20.32,0) 6(25.4,0)
  silkscreen extent -2.54,-4.1 27.94,5.2, body extent -3.05,-4.06 27.93,4.14, height 10
TB006-508-08BE [mm]
  rect 2.4x2.4 hole 1.6: 1(0,0)
  round 2.4 hole 1.6: 2(5.08,0) 3(10.16,0) 4(15.24,0) 5(20.32,0) 6(25.4,0) 7(30.48,0) 8(35.56,0)
  silkscreen extent -3.18,-4.1 38.1,5.2, body extent -3.04,-4.06 38.1,4.14, height 10
TB006-508-08BE_v2 [mm] "Modified Pin1 indicator"
  rect 2.4x2.4 hole 1.6: 1(0,0)
  round 2.4 hole 1.6: 2(5.08,0) 3(10.16,0) 4(15.24,0) 5(20.32,0) 6(25.4,0) 7(30.48,0) 8(35.56,0)
  silkscreen extent -4.16,-4.1 38.1,4.1, body extent -3.04,-4.06 38.1,4.14, height 10
TD03B [mil]
  rect 35x48 smd: 1(-89.96,-256) 3(89.96,-256)
  rect 265x256 smd: 2(0,6)
  silkscreen extent -106,-218 106,-146, body extent -130,-260 130,130, height 91
teensy_4_0 [mm]
  round 1.7 hole 1: 0(2.54,-15.24) 1(5.08,-15.24) 2(7.62,-15.24) 3(10.16,-15.24) 3V3(5.08,0) 3V3(33.02,-10.16) 4(12.7,-15.24) 5(15.24,-15.24) 6(17.78,-15.24) 7(20.32,-15.24) 8(22.86,-15.24) 9(25.4,-15.24) 10(27.94,-15.24) 11(30.48,-15.24) 12(33.02,-15.24) 13(33.02,0) 14(30.48,0) 15(27.94,0) 16(25.4,0) 17(22.86,0) 18(20.32,0) 19(17.78,0) 20(15.24,0) 21(12.7,0) 22(10.16,0) 23(7.62,0) GND(0,-15.24) GND(2.54,0) GND(33.02,-7.62) On_Off(33.02,-2.54) Program(33.02,-5.08) VBAT(33.02,-12.7) VIN(0,0)
  round 1.7 on Top Paste: 15(27.94,0)
  silkscreen extent -2.14,-16.78 34.59,1.4, body extent -1.27,-16.51 34.29,1.27, height 6.64
TSW-104-14-T-S [mm] "4 pins male header"
  rect 1.62x1.62 hole 1.02: 01(0,0)
  round 1.7 hole 1.02: 02(2.54,0) 03(5.08,0) 04(7.62,0)
  silkscreen extent -2.02,-1.27 8.89,1.27, body extent -1.4,-1.27 8.89,1.27, height 10.67

## Part data
3.3VA 3.3VD 5V 12V GND LC50 LC350 SCK SCL0 SDA0 SDI SDO T0 T1 T2 T3 VREF: "PC TEST POINT NATURAL"
C23: "CAP CER 4.7UF 16V X7R 0805"
C25 C26: "TANTALUM CAPACITOR, 10UF, 10V, 0805 10%,", Package=None, Availability=Unavailable, MP=TAJP106K010RNJ, Price=None
D1: "Yellow 590nm LED Indication - Discrete 2V 1206 (3216 Metric)"
F1: "PTC RESET FUSE 33V 1.5A 2SMD"
J3 J4 J6: "TERMINAL BLOCK, SCREW TYPE, 5.08"
J7 J8: "2~24 Poles, Screw Type, Horizontal, 5.08 Pitch, 24~12 _AWG_, Terminal Block Connector", Package=None, Availability=Unavailable, MF="CUI Devices", MP=TB007-508-02BE, Price=None, SnapEDA_Link=https://www.snapeda.com/parts/TB007-508-02BE/CUI%20Devices/view-part/3591212/?ref=snap
PS: "Linear Regulator Replacement DC DC Converter 1 Output 5V 1.5A 7V - 36V Input", Package="SIP-3 Murata Power", Availability=Unavailable, MF="Murata Power", MP=OKI-78SR-5/1.5-W36-C, Price=None, SnapEDA_Link=https://www.snapeda.com/parts/OKI-78SR-5/1.5-W36-C/Murata%20Power%20Solutions%20Inc./view-part/229597/?ref=snap
R1 R2 R4 R5: "2.2 kOhms Â±5% 0.4W, 2/5W Chip Resistor 0805 (2012 Metric) Automotive AEC-Q200, Pulse Withstanding Thick Film", Package="2012 Rohm Semiconductor", Check_prices=https://www.snapeda.com/parts/ESR10EZPJ222/Rohm/view-part/977759/?ref=eda, Digi-Key_Part_Number=RHM2.2KKCT-ND, MF=Rohm, MP=ESR10EZPJ222, Purchase-URL=https://pricing.snapeda.com/search/part/ESR10EZPJ222/?ref=eda, SnapEDA_Link=https://www.snapeda.com/parts/ESR10EZPJ222/Rohm/view-part/977759/?ref=snap
R3: "Resistor;Thick Film;Res 200 Kilohms;Pwr-Rtg 0.125 W;Tol 5%;SMT;0805;Tape & Reel", Package=None, Availability=Unavailable, MP=ERJ-6GEYJ204V, Price=None
R6: "RES 470 OHM 5% 1/4W 1206"
R7 R16 R27 R28 R31: "CRGH0805 1% 4K7 0.33W", Tolerance=±1%
R8 R9 R10 R11 R12 R13 R14 R15: "Res Thin Film 1206 100 Ohm 0.1% 0.125W(1/8W)", Supplier Part Number 1=RNCS1206BKE100RCT-ND, Tolerance=±0.1%, Supplier 1=Digi-Key
R17 R18 R19 R20 R25 R26: "1 kOhms ±1% 0.125W, 1/8W Chip Resistor 0805", Tolerance=±1%
R21 R22 R23 R24 R29 R30: "RES SMD 3K OHM 1% 1/8W 0805", Tolerance=±1%
R32: "165 Ohms ±1% 0.25W, 1/4W Chip Resistor 1206 (3216 Metric) Moisture Resistant Thick Film", Tolerance=±1%
R33: "RES SMD 10K OHM 5% 1/2W 0805", Tolerance=±5%
S1: "SWITCH TACTILE SPST-NO 0.05A 24V"
U1 U2: library part CMP-0055-00881-3, "CMOS Quad Operational Amplifier, 14-pin Narrow SOIC, Pb-Free", Manufacturer="Texas Instruments", Package Reference=D0014A, PackageTopMarking=NSUZXYTTE#*LMC660AIM, PowerWise=N, Code_IPC=SOIC127P600-14, Code_JEDEC=MS-012AB, ComponentLink1Description="Datasheet URL", ComponentLink1URL=http://www.ti.com/general/docs/lit/getliterature.tsp?genericPartNumber=LMC660&fileType=pdf, CompType=Amplifiers, PackageDescription="Molded Package S.O., .150in Wide, 14 Lead", PinCount=14, RoHS=Y
U3 U13: "No Description Available", RefDes=RefDes, Type=DEV
  U3: Built_By=EMA_Cory, Copyright="Copyright (C) 2018 Accelerated Designs. All rights reserved", Datasheet=https://www.nxp.com/docs/en/data-sheet/PCA9306.pdf, Manufacturer_Part_Number=PCA9306D,118, SourceLibrary=Add_to_database_2021-01-28, Vendor=NXP
  U13: Built_By=EMA_UL_Team, Copyright="Copyright (C) 2021 Accelerated Designs. All rights reserved", Manufacturer_Part_Number=TPS3847085DBVR, SourceLibrary=TI_2017-02-16, Vendor="Texas Instruments"
U9 U10: "External Input Sensor Amplifier", Package=None, Availability=Unavailable, MF=SparkFun, MP=SEN-13879, Price=None, SnapEDA_Link=https://www.snapeda.com/parts/SEN-13879/SparkFun%20Electronics/view-part/563337/?ref=snap
U11: library part MAX5725BAUP, "IC DAC 12BIT V-OUT 20TSSOP"
U12: "No Description Available", PartNumber=LMS8117ADT-33, base_pn=LMS8117A, Comp=TypeLDO, Copyright="Copyright (C) 2021 Accelerated Designs. All rights reserved", Library=ReferenceLMS8117ADT, Pin=Count3, RefDes=RefDes, Symbol=NameLMS8117ADT-33, Type=DEV, Vendor=NationalSemiconductor, Version=1

## Free pads (board coordinates)
  round 1.524 hole 3.4 unplated: 16(3.262,3.302) 16(3.262,96.647) 16(96.7,3.302) 16(96.7,96.647)

## Via types
v1: diameter 0.6, hole 0.3, Top Layer to Bottom Layer, tented both sides, 33 vias
v2: diameter 0.6, hole 0.3, Top Layer to Bottom Layer, 16 vias
v3: diameter 0.9, hole 0.45, Top Layer to Bottom Layer, 13 vias
v4: diameter 0.9, hole 0.45, Top Layer to Bottom Layer, tented both sides, 7 vias
v5: diameter 1.27, hole 0.711, Top Layer to Bottom Layer, 4 vias

## Nets (pads, with @x,y where several pads share a name; then routed paths per layer and width w, separated by ;. In a path a pad name is that pad's centre, name@x,y a point inside that pad or via, vN(x,y) a via of type N, cw(c..) or ccw(c..) an arc to the next point about the centre after c; other vN are vias at no path point)
3.3VA: 3.3VA.1 C10.2 C11.2 C20.2 C21.2 C23.2 C24.2 C26.1 U5.5 U6.5 U7.5 U8.5 U11.10 U12.1 | length 50.7
  Top Layer w0.254: U6.5@18.05,77.709 18.058,77.716 19.51,77.716 v1(19.518,77.724) ; U7.5@18.177,65.39 18.185,65.397 19.51,65.397 v1(19.518,65.405) ; U5.5@18.304,53.071 18.312,53.078 19.51,53.078 v1(19.518,53.086) ; U8.5@18.375,89.759 18.39,89.743 19.609,89.743 v1(19.625,89.728)
  Top Layer w0.508: 3.3VA.1@62.952,74.422 63.333,74.041 68.159,74.041 68.805,74.687
  Top Layer w1: U12.1@71.359,77.979 71.305,77.979 71.25,77.923 71.25,76.189 70.953,75.892 v5(70.953,75.819) 70.88,75.819 70.626,75.565 C26.1@68.805,75.565 68.805,74.687 68.805,60.441 70.867,58.379 74.489,58.379 74.497,58.371 74.889,58.371 76.376,56.884 C24.2@76.376,56.769 C24.2@76.432,56.713 ; C23.2@76.488,54.864 76.432,54.92 C24.2@76.432,56.713 ; 77.679,56.607 76.538,56.607 C24.2@76.432,56.713
  Bottom Layer w0.254: C20.2@17.74,65.316 17.829,65.405 v1(19.518,65.405) ; C11.2@18.972,79.121 19.518,78.575 v1(19.518,77.724) ; C21.2@19.48,91.313 19.625,91.168 v1(19.625,89.728) ; v1(19.518,53.086) 19.518,54.648 C10.2@19.734,54.864
3.3VD: 3.3VD.1 C8.2 C9.2 C18.2 C19.2 C22.2 C27.2 R1.2 R2.2 R7.2 R16.2 R31.2 U3.2 U4.3V3 U5.8 U6.8 U7.8 U8.8 U9.10 U10.10 U11.11 U11.17 U11.18 | length 55
  Top Layer w0.254: U5.8@24.034,51.771 C8.2@27.011,51.771 ; U7.8@24.034,64.09 24.116,64.008 v2(25.487,64.008) 26.592,64.008 C18.2@26.757,64.173 ; U6.8@24.034,76.409 24.034,75.151 C9.2@24.382,74.803 ; U8.8@24.034,88.459 24.393,88.459 24.471,88.381 24.471,88.022 24.879,87.614 25.238,87.614 C19.2@25.504,87.348 ; v1(24.344,73.152) 24.344,74.638 C9.2@24.382,74.676 ; C19.2@25.631,86.989 C19.2@25.631,87.348 ; v2(26.376,85.852) 26.376,87.338 C19.2@26.414,87.376 ; C8.2@27.265,51.771 27.393,51.643 v2(28.87,51.643) ; C18.2@27.265,64.3 C18.2@27.392,64.427 ; R7.2@33.888,88.519 v1(36.028,88.519) ; R16.2@56.729,64.281 58.234,64.281 cw(c58.234,64.262) v3(58.253,64.262) ; 59.269,93.853 U3.2@63.346,93.853 ; v3(76.052,50.781) cw(c76.052,50.711) 76.122,50.711 C22.2@76.122,49.022 76.503,49.403 77.803,49.403 ; U11.11@77.934,50.582 77.934,49.534 ; U11.17@81.834,50.582 81.834,49.657 ; U11.18@82.484,50.582 82.484,49.552 82.335,49.403 82.042,49.403 ; 77.803,49.403 78.065,49.403 ; 77.803,49.403 77.934,49.534 ; 77.934,49.534 78.065,49.403 ; 78.065,49.403 81.58,49.403 ; 81.58,49.403 81.748,49.403 ; 81.58,49.403 81.834,49.657 ; 81.748,49.403 81.834,49.489 81.834,49.611 ; 81.748,49.403 82.042,49.403 ; 81.834,49.611 81.834,49.657 ; 81.834,49.611 82.042,49.403
  Top Layer w1.5: U4.3V3@49.236,80.01 57.345,80.01 R31.2@57.491,80.156 57.237,80.41 3.3VD.1@57.237,84.074 ; v5(56.348,95.504) C27.2@58.291,95.504 58.72,95.075 R2.2@58.72,92.202 ; R1.2@58.847,90.678 R2.2@58.847,92.075 ; R2.2@58.72,92.202 cw(c58.72,92.075) R2.2@58.847,92.075 ; R2.2@58.72,92.202 cw(c58.72,92.075) 58.847,92.086 cw(c58.72,92.075) R2.2@58.847,92.075
5V: 5V.1 C25.1 J1.02 PS.3 R3.2 R4.2 R5.2 U4.VIN U9.9 U10.9 U12.3 | length 52.7
  Top Layer w0.508: U4.VIN@49.236,85.09 53.808,85.09 55.967,87.249 67.397,87.249 68.805,85.841 68.805,84.686 69.126,84.365 69.265,84.365 70.891,82.739 71.169,82.739 U12.3@71.359,82.549 71.525,82.549 72.529,83.554 72.796,83.82 ; J1.02@69.596,97.663 69.824,97.435 69.824,97.054 71.057,95.821 72.211,95.821 R3.2@72.477,95.555 73.569,95.555 73.874,95.25 73.874,84.923 72.783,83.832 ; 5V.1@82.764,74.676 82.891,74.803 PS.3@82.891,79.375
  Bottom Layer w0.254: R4.2@65.111,93.939 R5.2@67.229,93.939 ; v1(67.143,92.964) R5.2@67.143,93.853
+12: 12V.1 C28.2 C29.2 C30.2 F1.1 PS.1 R27.2 U1.4 U2.4 U13.4 U13.5 | length 96.3
  Top Layer w0.254: U1.4@76.102,41.402 77.717,41.402 77.844,41.529 v1(77.938,41.529) ; U2.4@77.626,64.77 v1(79.081,64.77) ; v1(84.161,69.342) 85.45,69.342 R27.2@85.558,69.234
  Top Layer w0.508: U13.5@64.279,71.698 U13.5@64.288,71.698 64.288,72.346 64.84,72.898 v4@66.12,72.898 ; v4(66.127,72.898) 66.127,71.759 ccw(c66.188,71.759) U13.4@66.188,71.698 ; C28.2@73.658,74.549 73.666,74.557 73.666,80.945 12V.1@73.747,81.026 76.287,81.026 PS.1@77.811,79.502
  Bottom Layer w0.508: v4(66.127,72.898) 77.811,72.898
  Bottom Layer w2: C29.2@77.595,39.878 77.595,41.313 78.192,41.91 78.192,62.611 ; v1(84.161,69.342) 77.811,69.342 ; F1.1@84.161,85.201 84.02,85.06 84.02,84.264 81.43,84.264 77.811,80.645 PS.1@77.811,79.502 77.811,72.898 77.811,69.342 ; 77.811,65.942 77.811,64.091 78.192,63.71 ; 77.811,65.942 v1@78.983,64.77 ; 77.811,65.942 77.811,69.342 ; 78.192,62.611 78.446,62.865 C30.2@80.643,62.865 79.081,64.427 v1(79.081,64.77) v1@78.983,64.77 ; 78.192,62.611 78.192,63.71 ; 78.192,63.71 78.192,64.24 78.722,64.77 v1@78.983,64.77
CS_DAC: U4.16 U11.15 | length 35.9
  Top Layer w0.254: U4.16@49.236,59.817 60.539,59.817 67.397,52.959 79.462,52.959 80.534,51.887 U11.15@80.534,50.582
CS_T0: U4.8 U5.9 | length 23.4
  Top Layer w0.254: U5.9@24.034,52.421 23.956,52.343 23.093,52.343 22.967,52.217 22.967,51.443 23.551,50.859 29.049,50.859 29.702,51.511 29.702,53.951 v1(29.678,53.975)
  Bottom Layer w0.254: v1(29.678,53.975) 29.805,54.102 31.202,54.102 32.091,54.991 32.091,61.722 32.726,62.357 U4.8@33.996,62.357
CS_T1: U4.5 U7.9 | length 13.7
  Top Layer w0.254: U7.9@24.034,64.74 25.277,64.74 26.245,65.708 28.122,65.708 28.437,66.023 28.629,66.215 28.916,66.502 28.916,69.215 29.551,69.85 U4.5@33.996,69.85
CS_T2: U4.3 U6.9 | length 10.8
  Top Layer w0.254: U6.9@24.034,77.059 27.835,77.059 29.964,74.93 U4.3@33.996,74.93
CS_T3: U4.1 U8.9 | length 17
  Top Layer w0.254: U8.9@24.034,89.109 26.929,89.109 27.519,88.519 27.519,82.931 30.313,80.137 U4.1@33.996,80.137
DATA_RDY_T0: U4.7 U5.7 | length 27.3
  Top Layer w0.254: U5.7@18.304,51.771 20.235,51.771 20.661,52.197 v1(20.661,60.198)
  Bottom Layer w0.254: v1(20.661,60.198) v1@23.963,60.198 ; v1(23.92,60.195) 30.183,60.195 31.202,61.214 31.202,63.754 32.345,64.897 U4.7@33.996,64.897
DATA_RDY_T1: U4.6 U7.7 | length 23.9
  Top Layer w0.254: U7.7@18.304,64.09 20.325,64.09 20.788,63.627 v1(20.788,61.087) ; v1(23.836,61.087) 29.043,61.087 29.805,61.849 29.805,66.675 30.567,67.437 U4.6@33.996,67.437
  Bottom Layer w0.254: v1(20.788,61.087) v1(23.836,61.087)
DATA_RDY_T2: U4.4 U6.7 | length 21.2
  Top Layer w0.254: U6.7@18.304,76.409 19.417,76.409 20.534,75.292 v1(20.534,71.374) ; v1(23.709,70.612) 32.091,70.612 U4.4@33.996,72.517
  Bottom Layer w0.254: v1(20.534,71.374) 21.296,70.612 v1(23.709,70.612)
DATA_RDY_T3: U4.2 U8.7 | length 24.3
  Top Layer w0.254: U8.7@18.304,88.459 18.375,88.388 v1(18.375,86.868) ; v1(23.836,85.471) 23.902,85.405 23.902,82.865 24.598,82.169 27.265,82.169 27.9,81.534 27.9,78.613 28.916,77.597 U4.2@33.996,77.597
  Bottom Layer w0.254: v1(18.375,86.868) 19.772,85.471 v1(23.836,85.471)
GND: C1.1 C4.1 C5.2 C6.1 C7.2 C8.1 C9.1 C10.1 C11.1 C14.1 C15.2 C16.1 C17.2 C18.1 C19.1 C20.1 C21.1 C22.1 C23.1 C24.1 C25.2 C26.2 C27.1 C28.1 C29.1 C30.1 D1.1 GND.1 J1.01 J3.5 J3.6 J4.5 J4.6 J5.2 J5.4 J5.6 J5.8 J6.1 J6.2 J6.3 J6.5 J7.2 J8.2 PS.2 Q1.3 R17.1 R18.1 R19.1 R20.1 R25.1 R26.1 R28.1 R32.1 S1.1 U1.11 U2.11 U3.1 U4.GND U5.1 U5.14 U6.1 U6.14 U7.1 U7.14 U8.1 U8.14 U9.5 U9.6 U10.5 U10.6 U11.19 U11.20 U12.2 U13.2 | length 128.6
  Top Layer w0.254: v1(11.517,87.63) C17.2@13.324,87.63 ; C7.2@12.943,82.296 12.943,82.541 13.763,83.361 13.763,83.804 v2(13.829,83.871) ; C15.2@15.679,70.993 v4(17.613,70.993) 17.613,72.956 C6.1@17.682,73.025 ; C5.2@15.806,58.674 v2(17.867,58.674) 17.867,57.658 18.304,57.221 U5.1@18.304,55.671 ; C14.1@15.806,62.357 v4(17.359,62.357) ; C16.1@16.187,93.98 v1(17.74,93.98) 18.304,93.416 U8.1@18.304,92.359 ; v3(17.359,47.625) 17.483,47.749 17.483,48.041 18.854,49.412 C4.1@18.854,49.657 ; v2(18.248,81.407) 18.248,80.365 U6.1@18.304,80.309 ; U7.1@18.304,67.99 18.345,68.031 19.559,68.031 v1(19.602,67.988) ; U8.14@23.441,92.437 23.52,92.359 U8.14@24.034,92.359 24.064,92.329 25.36,92.329 25.741,91.948 25.741,91.186 26.197,90.73 S1.1@27.301,90.73 ; U5.14@24.034,55.671 26.293,55.671 ; U7.14@24.034,67.99 25.797,67.99 26.642,67.145 C18.1@26.757,67.145 ; U6.14@24.034,80.309 24.079,80.264 v2(25.614,80.264) ; C8.1@27.265,54.953 27.392,55.08 v2(27.392,56.642) ; C9.1@27.354,74.676 v4(29.043,74.676) ; C18.1@27.392,67.145 v3(27.392,68.834) ; C19.1@28.916,87.122 31.075,87.122 32.98,85.217 U4.GND@33.996,85.217 ; D1.1@59.626,72.517 60.92,72.517 v3(61.555,71.882) 61.679,71.758 61.679,71.533 62.481,70.731 Q1.3@62.581,70.731 ; v4(61.301,97.028) 61.301,95.542 C27.1@61.263,95.504 61.644,95.123 U3.1@63.346,95.123 ; v1(65.238,67.056) U13.2@65.238,68.764 ; C26.2@67.005,75.565 65.873,75.565 65.746,75.692 65.746,75.739 65.455,76.03 v4(65.455,76.205) 65.455,79.513 U12.2@64.705,80.264 65.238,80.797 v3(65.238,84.836) C25.2@67.005,84.836 ; v3(69.683,44.958) R17.1@71.861,44.958 ; v3(70.826,37.719) 72.331,37.719 ccw(c72.331,37.738) R20.1@72.35,37.738 ; v1(71.588,61.087) 71.588,60.052 R19.1@71.696,59.944 ; R17.1@71.664,45.085 ccw(c71.664,45.193) R17.1@71.772,45.193 ; v1(71.715,71.12) 73.093,71.12 R18.1@73.112,71.139 ; v3(73.112,50.8) v3@73.112,50.546 ; C22.1@73.15,49.022 v3@73.15,50.508 ; v2(73.239,54.991) 73.333,54.991 73.46,54.864 74.562,54.864 74.089,55.337 74.089,55.969 73.404,56.654 C24.1@73.404,56.769 ; v4(80.224,41.402) U1.11@81.552,41.402 ; U2.11@83.076,64.77 v3(84.669,64.77) ; U11.19@83.134,50.582 83.134,51.689 ; v1(83.145,52.197) 83.134,52.197 83.134,51.689 ; U11.20@83.784,50.582 83.731,50.635 83.731,51.484 83.526,51.689 83.134,51.689 ; R25.1@85.685,44.812 cw(c85.704,44.812) 85.704,44.831 v3(87.209,44.831) ; R26.1@85.939,37.992 ccw(c85.958,37.992) 85.958,37.973 v3(87.463,37.973) ; v3(86.828,61.214) R28.1@86.828,62.592 ; 26.293,55.671 cw(c26.293,54.953) 27.011,54.953 ccw(c26.293,54.953) 26.293,55.671 ; v3@73.112,50.546 cw(c73.112,50.508) v3@73.15,50.508 ; v3@73.112,50.546 cw(c73.112,50.508) v3@73.15,50.508
  Top Layer w0.508: C28.1@76.63,74.549 76.63,74.664 80.337,78.371 80.337,79.488 PS.2@80.351,79.502 ; J7.2@82.891,91.186 83.302,91.597 84.252,91.597 87.463,94.808 GND.1@87.463,95.758
  Bottom Layer w0.254: C11.1@16,79.121 16,79.236 18.171,81.407 v2(18.248,81.407) ; C21.1@16.508,91.313 16.508,92.748 v1(17.74,93.98) ; C10.1@16.762,54.864 16.762,57.569 v2(17.867,58.674) ; C20.1@17.74,68.288 18.04,67.988 v1(19.602,67.988) ; R32.1@44.791,64.415 v2(44.791,66.421) ; J1.01@72.223,97.79 72.35,97.663 73.239,97.663 73.798,97.104 C1.1@73.798,95.758 ; v4(80.224,41.402) 80.224,40.221 C29.1@80.567,39.878 ; C30.1@83.615,62.865 84.283,63.533 84.283,64.209 84.669,64.595 v3(84.669,64.77)
LC_50_CLK: U4.15@49.236,57.277 U9.7 | length 21.3
  Bottom Layer w0.254: U4.15@49.236,57.15 51.395,57.15 ; U9.7@53.935,43.434 53.935,54.61 ; 51.395,57.15 cw(c51.395,54.61) 53.935,54.61 ; 51.395,57.15 cw(c51.395,54.61) 53.935,54.61
LC_50_DAT: U4.14 U9.8 | length 15.8
  Bottom Layer w0.254: U9.8@51.395,43.434 51.395,52.451 ; 51.395,52.451 ccw(c49.236,52.451) 49.236,54.61 cw(c49.236,52.451) 51.395,52.451
LC_50_OUT: J6.4 R30.2 U1.8 | length 12.9
  Top Layer w0.254: U1.8@81.552,37.592 83.131,37.592 83.658,38.119 83.78,38.119 83.78,37.36 84.134,37.006 91.908,37.006 92.592,36.322 J6.4@93.051,36.322
LC_350_CLK: U4.10 U10.7 | length 36.9
  Bottom Layer w0.254: U10.7@29.043,43.434 29.043,41.91 ; U4.10@33.996,57.277 36.155,57.277 ; 29.043,41.91 ccw(c30.313,41.91) 30.313,40.64 ; 29.043,41.91 ccw(c30.313,41.91) 30.313,40.64 ; 30.313,40.64 36.409,40.64 ; 36.155,57.277 cw(c36.155,55.626) 37.806,55.626 ; 36.155,57.277 cw(c36.155,55.626) 37.806,55.626 ; 36.409,40.64 ccw(c36.409,42.037) 37.806,42.037 ; 36.409,40.64 ccw(c36.409,42.037) 37.806,42.037 ; 37.806,42.037 37.806,55.626
LC_350_DAT: U4.9 U10.8 | length 52
  Bottom Layer w0.254: U10.8@26.503,43.434 26.503,41.91 ; U4.9@33.996,59.817 37.806,59.817 ; 26.503,41.91 ccw(c28.535,41.91) 28.535,39.878 ; 26.503,41.91 ccw(c28.535,41.91) 28.535,39.878 ; 28.535,39.878 37.679,39.878 ; 37.679,39.878 ccw(c37.679,42.545) 40.346,42.545 ; 37.679,39.878 ccw(c37.679,42.545) 40.346,42.545 ; 37.806,59.817 cw(c37.806,57.277) 40.346,57.277 ; 37.806,59.817 cw(c37.806,57.277) 40.346,57.277 ; 40.346,42.545 40.346,57.277
LC_350_OUT: J6.6 R29.2 U1.14 | length 12.9
  Top Layer w0.254: U1.14@81.552,45.212 84.313,45.212 84.84,45.739 91.876,45.739 92.619,46.482 J6.6@93.051,46.482 J6.6@92.651,46.082 ; R29.2@83.488,44.958 R29.2@83.653,44.793 R29.2@83.763,44.793
LED: R6.2 U4.21 | length 2.4
  Top Layer w0.254: U4.21@49.236,72.517 R6.2@51.607,72.517
MISO: SDO.1 U4.12 U5.11 U6.11 U7.11 U8.11 U11.12 | length 123.9
  Top Layer w0.254: v1(22.185,53.675) v1(22.185,66.04) v1(22.185,78.313) 22.185,89.408 ; U7.11@23.907,66.04 23.953,65.994 25.406,65.994 v2(25.487,65.913) ; U5.11@24.034,53.721 24.065,53.752 v2(25.724,53.752) ; U6.11@24.034,78.359 24.08,78.313 26.457,78.313 v2(26.503,78.359) ; U8.11@24.105,90.409 24.027,90.331 23.108,90.331 ; U4.12@33.996,52.07 ccw(c35.647,52.07) 34.015,51.819 34.015,51.317 ; 55.459,48.895 ccw(c55.577,48.895) 55.577,48.777 ; U11.12@78.584,50.582 U11.12@78.584,51.319 ; 22.185,89.408 cw(c23.108,89.408) 23.108,90.331 ; 22.185,89.408 cw(c23.108,89.408) 23.108,90.331 ; 34.015,51.317 ccw(c36.555,51.317) 36.555,48.777 ; 34.015,51.317 ccw(c36.555,51.317) 36.555,48.777 ; 36.555,48.777 70.708,48.777 ccw(c70.708,49.403) 71.334,49.403 71.334,50.927 ; 71.334,50.927 cw(c72.066,50.927) 72.066,51.659 ; 71.334,50.927 cw(c72.066,50.927) 72.066,51.659 ; 72.066,51.659 78.244,51.659 ; 78.244,51.659 cw(c78.244,51.319) U11.12@78.584,51.319 ; 78.244,51.659 cw(c78.244,51.319) U11.12@78.584,51.319
  Bottom Layer w0.254: v1(22.185,53.675) ccw(c23.536,53.675) 23.536,52.324 25.741,52.324 ; v1(22.185,66.04) 25.36,66.04 v2(25.487,65.913) ; v1(22.185,78.313) 26.457,78.313 v2(26.503,78.359) ; v2(25.724,53.752) 25.778,53.752 25.879,53.651 cw(c25.741,53.438) 25.995,53.44 ; 25.995,53.44 25.995,52.578 ; 26.376,52.324 26.249,52.324 ; U4.12@33.996,52.197 33.869,52.324 26.249,52.324 ; 25.741,52.324 ccw(c25.741,52.578) 25.995,52.578 ; 25.741,52.324 26.249,52.324 ; 25.995,52.578 ccw(c26.249,52.578) 26.249,52.324